# EAGLE board 3DPRINTER_HEATER2-4d (EAGLE 6.1)
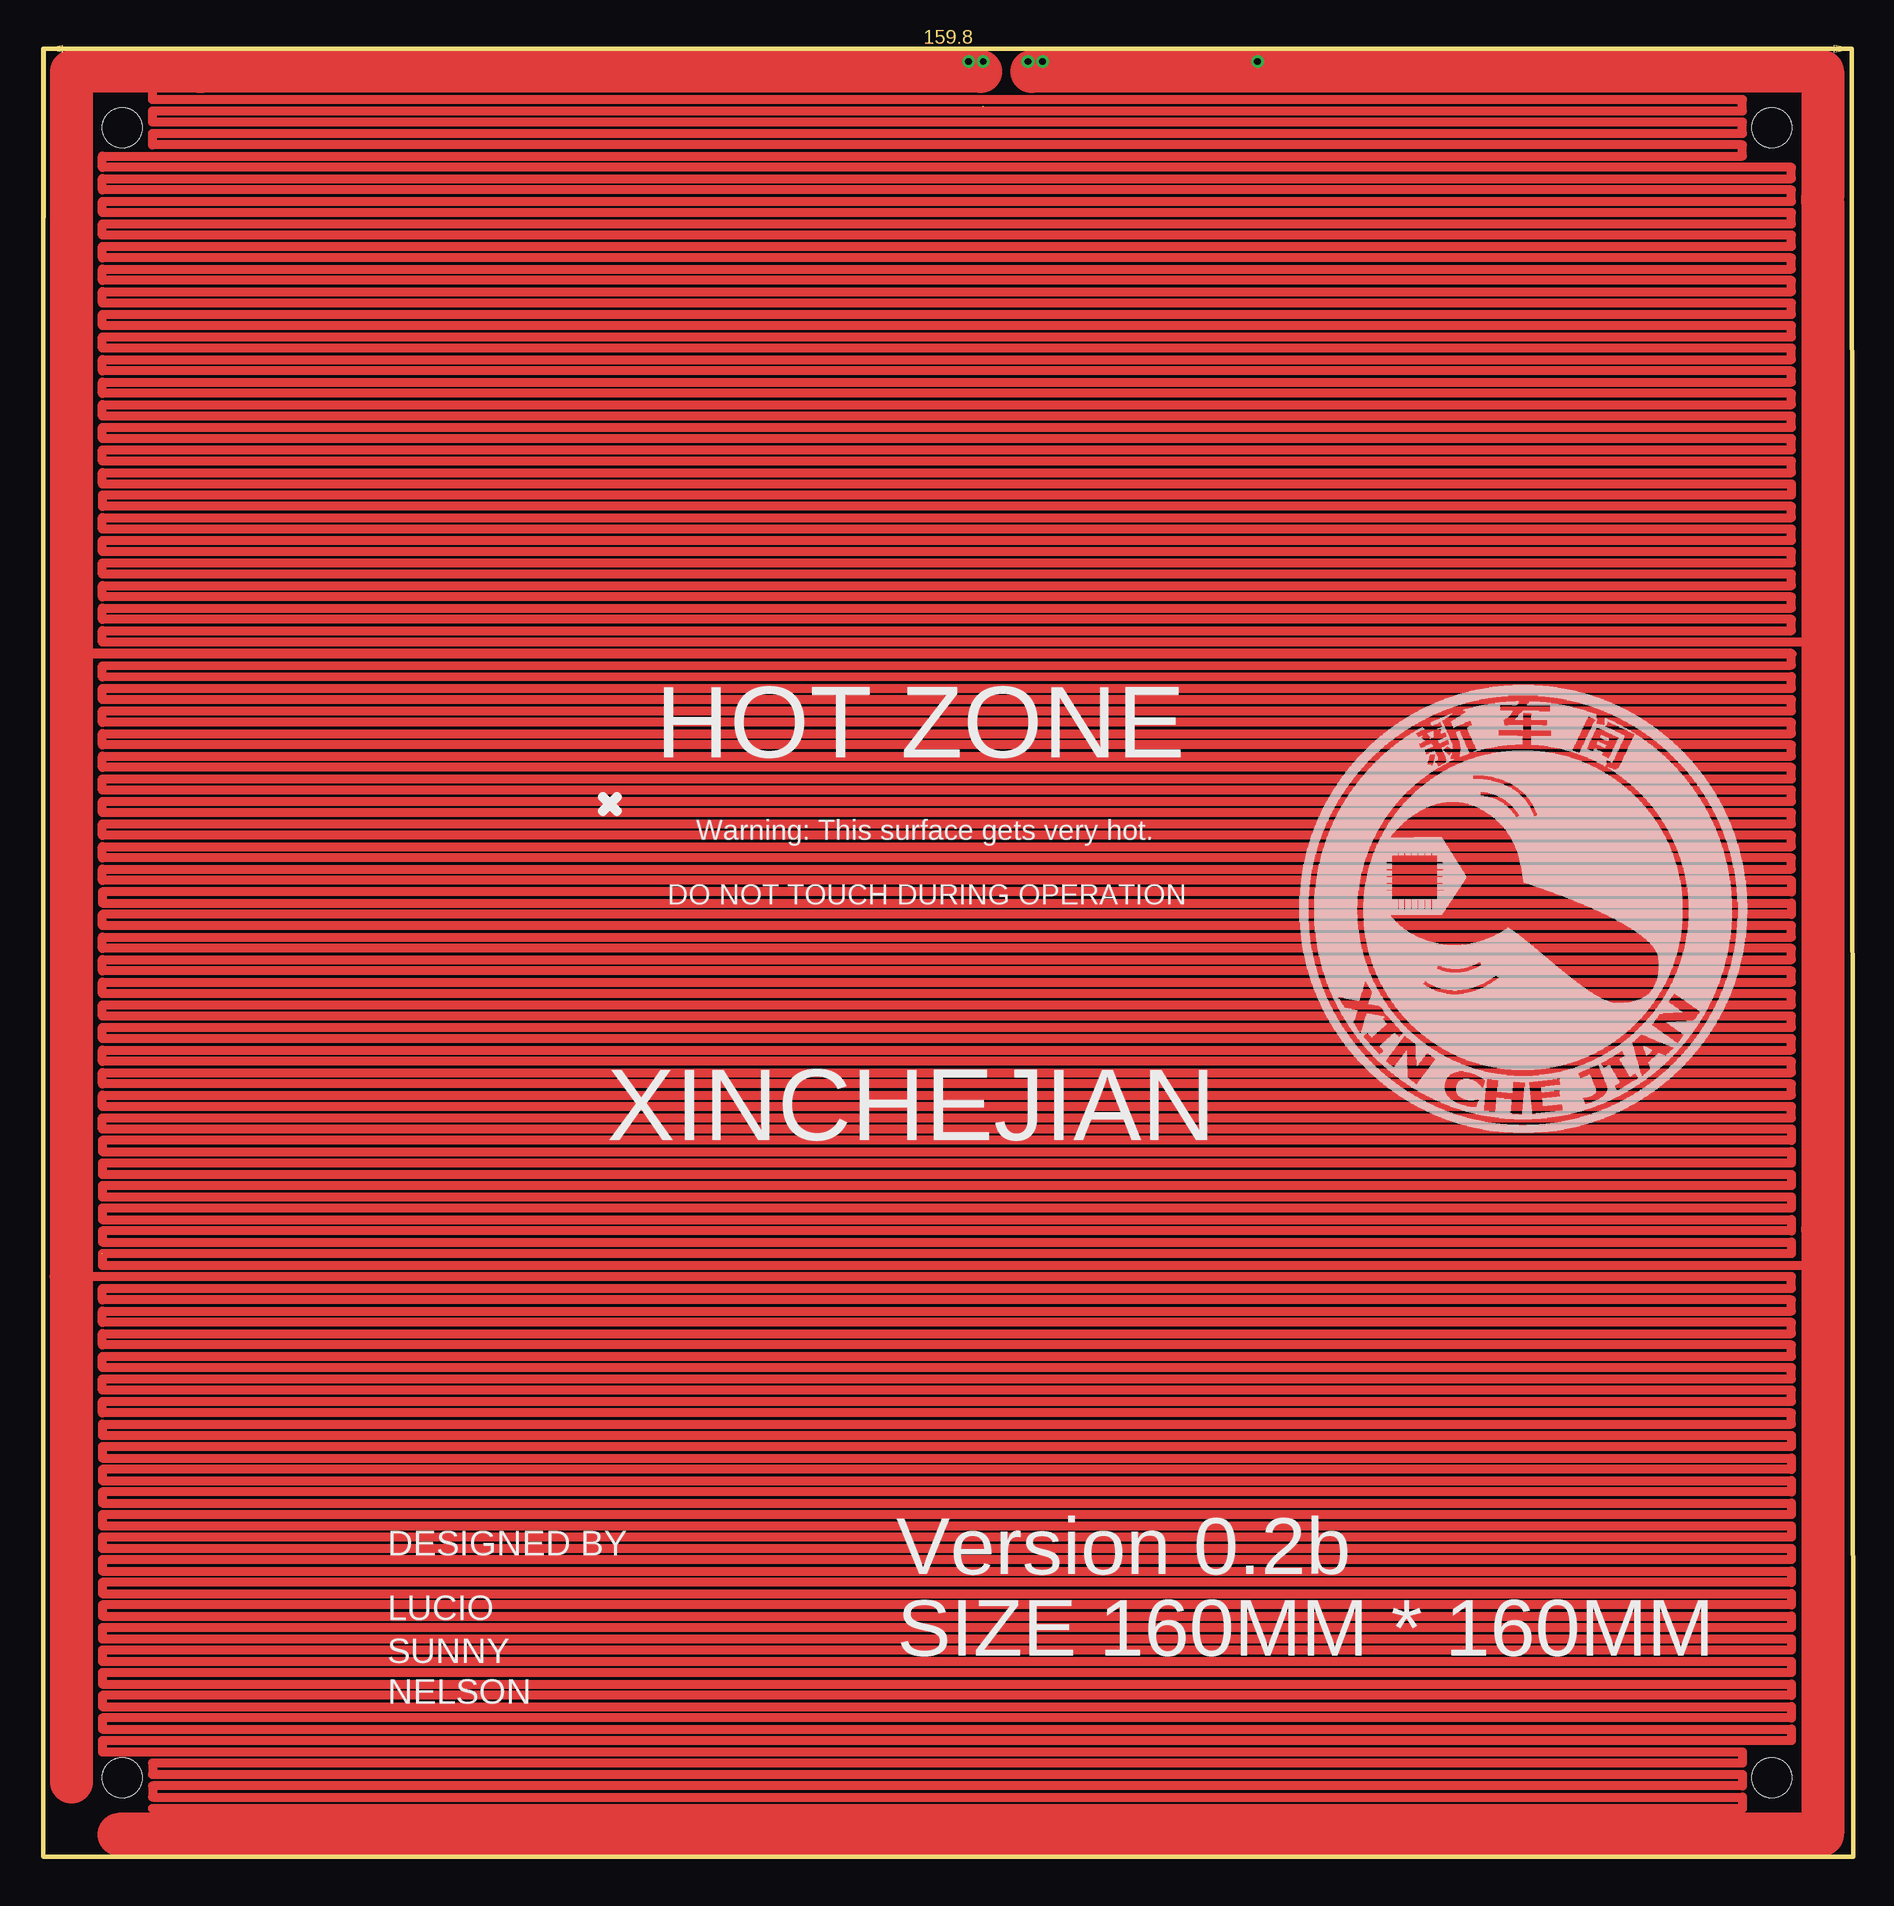
[diagram p0: board, top side]
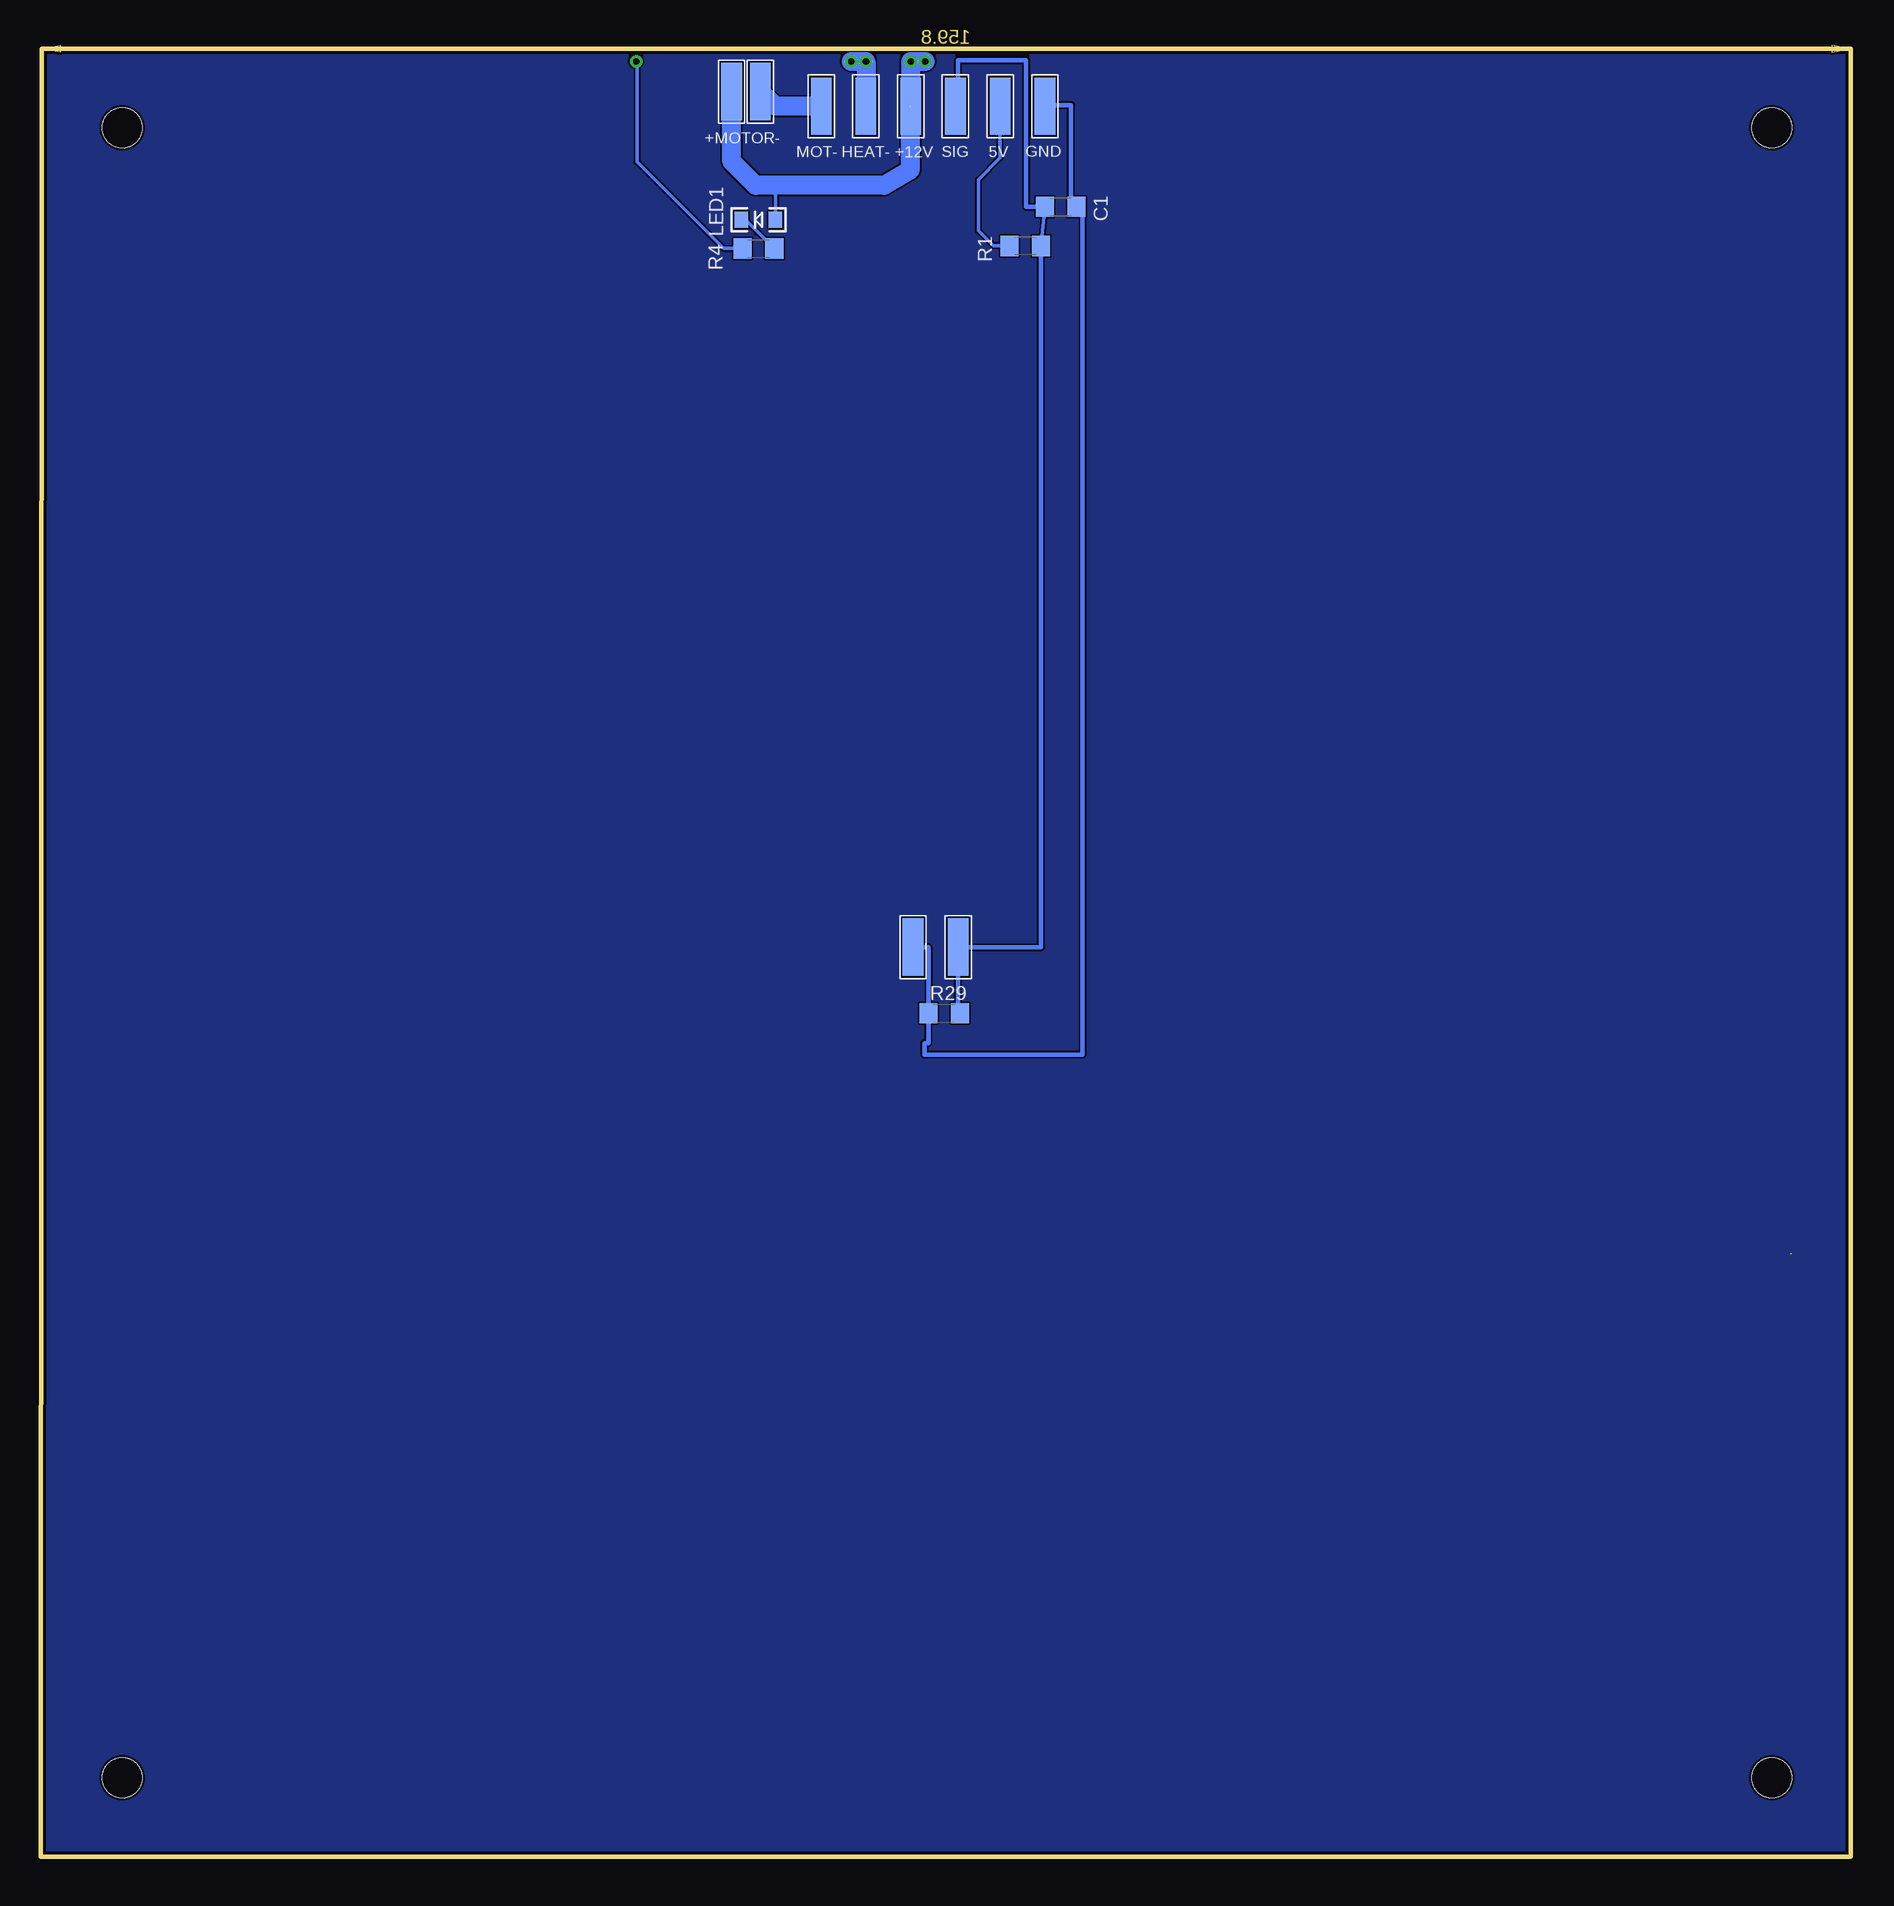
[diagram p1: board, bottom side, seen from below]

Size 160.2 x 160 mm. Coordinates in mm from the lower left corner, seen from the top.
Outline: 120.2,160 0.2,160 0,40
Outline: 160.1,160 160.2,0 0,0 0,160 160.1,160
Copper layers (1*16): Top 0.035mm / dielectric 1.5mm / Bottom 0.035mm
Design rules: minimum track width 10mil, minimum drill 20mil, track to track 6mil, track to pad 10mil, pad to pad 10mil, via to via 10mil, smd to smd 10mil, copper to edge 10mil, drill to drill 8mil, minimum pad ring 12mil, minimum via ring 10mil, stop-mask expansion 4mil, vias tented up to drill 25mil, thermal gap 10mil
Holes 3.5 mm at 153,153 7,153 7,7 153,7

## Footprints (pad centres in the part's own frame; a part is rotated, then mirrored left to right if it is on the bottom)
5-1,8 = smd 1.829 x 5.08: 1 0,0
C1206 = smd 1.6 x 1.8: 1 -1.4,0; 2 1.4,0
LED-1206 = smd 1.2 x 1.4: A -1.5,0; C 1.5,0
1206 = smd 1.6 x 1.8: 1 -1.4,0; 2 1.4,0

## Placement (x,y rotation side)
+12V  WIREPADSMD5-1,8  [5-1,8]  83.21,154.91 180 bottom
C1  [C1206]  69.93,146.01 0 bottom
GND-PAD1  WIREPADSMD5-1,8  [5-1,8]  83,80.5 0 bottom
GND-PAD7  WIREPADSMD5-1,8  [5-1,8]  71.32,154.91 180 bottom
HEATER-  WIREPADSMD5-1,8  [5-1,8]  87.17,154.91 180 bottom
LED1  [LED-1206]  96.68,144.87 180 bottom
MOTOR+  WIREPADSMD5-1,8  [5-1,8]  99.06,156.2 0 bottom
MOTOR-  WIREPADSMD5-1,8  [5-1,8]  96.52,156.2 0 bottom
MPOWER-  WIREPADSMD5-1,8  [5-1,8]  91.14,154.91 0 bottom
R1  [1206]  73.07,142.55 180 bottom
R4  [1206]  96.68,142.33 0 bottom
R29  [1206]  80.23,74.65 0 bottom
SIG-PAD1  WIREPADSMD5-1,8  [5-1,8]  79,80.5 0 bottom
SIG-PAD5  WIREPADSMD5-1,8  [5-1,8]  79.25,154.91 180 bottom
VCC-PAD6  WIREPADSMD5-1,8  [5-1,8]  75.29,154.91 180 bottom

## Library data of the parts
+12V GND-PAD1 GND-PAD7 HEATER- MOTOR+ MOTOR- MPOWER- SIG-PAD1 SIG-PAD5 VCC-PAD6 = wirepad
C1 = resistor
LED1 R1 R4 R29 = SparkFun

## Nets
N$1: R4.1
N$2: LED1.C R4.2
N$3: C1.2 GND-PAD1.1 GND-PAD7.1 R29.1
N$4: C1.1 R1.1 R29.2 SIG-PAD1.1 SIG-PAD5.1
N$6: MOTOR-.1 MPOWER-.1
N$8: R1.2 VCC-PAD6.1
N$37: +12V.1 LED1.A MOTOR+.1
S$3: HEATER-.1

## Tracks (layer width: path | path; a pad name or v marks a point on that pad's centre or on a via)
N$1  (via drill 0.6)
  Bottom 0.305: 107.48,158.86 v107.49,158.87 107.44,158.82 107.44,149.98 99.79,142.33 98.23,142.33
  Bottom 0.508: 98.04,142.33 R4.1 98.23,142.33
N$2
  Bottom 0.305: LED1.C 97.82,144.87 R4.2
N$3
  Bottom 0.305: GND-PAD7.1 71.12,155.11
  Bottom 0.406: GND-PAD7.1 71.32,155 69,155 69,146.01 C1.2 68,146.01 68,71 82,71 82,72 81.63,72 R29.1 81.63,80.5 GND-PAD1.1
N$4
  Bottom 0.305: SIG-PAD5.1 79.25,156.43 | 71.68,142.54 R1.1 C1.1
  Bottom 0.406: SIG-PAD5.1 79,154.91 79,159 73,159 73,146 71,146 71,146.01 C1.1 | R29.2 79,74.65 SIG-PAD1.1 71.67,80.5 R1.1
N$6
  Bottom 1.676: MPOWER-.1 95.22,154.91 MOTOR-.1
N$8
  Bottom 0.305: R1.2 74.48,142.56 75.89,142.56 77.22,143.89 77.22,148.41 75.29,150.34 VCC-PAD6.1
N$37  (1 unrouted)
  Bottom 0.305: 97.07,148.04 97.07,147.9 | LED1.A 95.18,147.83 95.25,147.9
  Bottom 1.676: 83.24,154.88 83.24,149.3 85.55,147.9 95.25,147.9 96.93,147.9 97.07,148.04 99.06,150.03 MOTOR+.1
S$1
  Top 0.813: 154.75,55.4 5.25,55.4
S$2  (via drill 0.6)
  Bottom 1.676: v81.92,158.87 v83.21,158.87 83.21,154.91
S$3  (via drill 0.6)
  Bottom 0.305: HEATER-.1 87.22,154.96
  Bottom 0.864: HEATER-.1 87.22,154.91
  Bottom 1.016: HEATER-.1 87.22,154.86
  Bottom 1.676: v88.47,158.87 v87.17,158.87 HEATER-.1
S$4
  Top 2.54: 145,158 145.5,158
S$5  (1 unrouted)
  Top 0.406: 5.25,57.4 5.25,56.3 154.75,56.3 | 5.25,55.4 5.25,55.5 154.75,55.5 | 154.75,58.4 154.75,58.2 | 154.75,54.35 154.75,54.4 | 154.75,53.4 154.75,53.55
  Top 0.813: 154.75,58.4 5.25,58.4 5.25,59.4 154.75,59.4 154.75,60.4 5.25,60.4 5.25,61.4 154.75,61.4 154.75,62.4 5.25,62.4 5.25,63.4 154.75,63.4 154.75,64.4 5.25,64.4 5.25,65.4 154.75,65.4 154.75,66.4 5.25,66.4 5.25,67.4 154.75,67.4 154.75,68.4 5.25,68.4 5.25,69.4 154.75,69.4 154.75,70.4 5.25,70.4 5.25,71.4 154.75,71.4 154.75,72.4 5.25,72.4 5.25,73.4 154.75,73.4 154.75,74.4 5.25,74.4 5.25,75.4 154.75,75.4 154.75,76.4 5.25,76.4 5.25,77.4 154.75,77.4 154.75,78.4 5.25,78.4 5.25,79.4 154.75,79.4 154.75,80.4 5.25,80.4 5.25,81.4 154.75,81.4 154.75,82.4 5.25,82.4 5.25,83.4 154.75,83.4 154.75,84.4 5.25,84.4 5.25,85.4 154.75,85.4 154.75,86.4 5.25,86.4 5.25,87.4 154.75,87.4 154.75,88.4 5.25,88.4 5.25,89.4 154.75,89.4 154.75,90.4 5.25,90.4 5.25,91.4 154.75,91.4 154.75,92.4 5.25,92.4 5.25,93.4 154.75,93.4 154.75,94.4 5.25,94.4 5.25,95.4 154.75,95.4 154.75,96.4 5.25,96.4 5.25,97.4 154.75,97.4 154.75,98.4 5.25,98.4 5.25,99.4 154.75,99.4 154.75,100.4 5.25,100.4 5.25,101.4 154.75,101.4 154.75,102.4 5.25,102.4 5.25,103.4 154.75,103.4 154.75,104.45 5.25,104.4 5.25,105.4 154.75,105.45 154.75,106.45 | 154.75,58.2 154.75,57.4 5.25,57.4 5.25,56.4 154.75,56.4 | 154.75,56.3 154.75,55.5 | 154.75,54.4 5.25,54.4 5.25,55.4 | 5.25,53.4 154.75,53.4 | 154.75,54.35 154.75,53.55 | 158,52.35 5.25,52.35 5.25,53.35
  Top 0.863: 154.75,106.45 1.1,106.45
S$6
  Top 3.81: 157.5,2 6.7,2
S$8
  Top 0.813: 0.95,51.35 154.75,51.35 154.75,50.3 5.25,50.3 5.25,49.3 154.75,49.3 154.75,48.3 5.25,48.3 5.25,47.3 154.75,47.3 154.75,46.3 5.25,46.3 5.25,45.3 154.75,45.3 154.75,44.3 5.25,44.3 5.25,43.3 154.75,43.3 154.75,42.3 5.25,42.3 5.25,41.3 154.75,41.3 154.75,40.3 5.25,40.3 5.25,39.3 154.75,39.3 154.75,38.3 5.25,38.3 5.25,37.3 154.75,37.3 154.75,36.3 5.25,36.3 5.25,35.3 154.75,35.3 154.75,34.3 5.25,34.3 5.25,33.3 154.75,33.3 154.75,32.3 5.25,32.3 5.25,31.3 154.75,31.3 154.75,30.3 5.25,30.3 5.25,29.3 154.75,29.3 154.75,28.3 5.25,28.3 5.25,27.3 154.75,27.3 154.75,26.3 5.25,26.3 5.25,25.3 154.75,25.3 154.75,24.3 5.25,24.3 5.25,23.3 154.75,23.3 154.75,22.3 5.25,22.3 5.25,21.3 154.75,21.3 154.75,20.3 5.25,20.3 5.25,19.3 154.75,19.3 154.75,18.3 5.25,18.3 5.25,17.3 154.75,17.3 154.75,16.3 5.25,16.3 5.25,15.3 154.75,15.3 154.75,14.3 5.25,14.3 5.25,13.3 154.75,13.3 154.75,12.3 5.25,12.3 5.25,11.3 154.75,11.3 154.75,10.3 5.25,10.3 5.25,9.3
S$14
  Top 2.54: 145.41,158.11 87.63,158.11
S$15
  Top 0.813: 5.25,9.3 150.4,9.3 150.4,8.3 9.7,8.3 9.7,7.3 150.4,7.3 150.4,6.3 9.7,6.3 9.7,5.3 150.4,5.3 150.4,4.3 9.7,4.3
S$16
  Top 0.813: 9.7,158 9.7,155.5 150.4,155.5 150.4,154.5 9.7,154.5 9.7,153.5 150.4,153.5 150.4,152.5 9.7,152.5 9.7,151.5 150.4,151.5 150.4,150.5 5.25,150.5 5.25,149.5 154.75,149.5 154.75,148.5 5.25,148.5 5.25,147.5 154.75,147.5 154.75,146.5 5.25,146.5 5.25,145.5 154.75,145.5 154.75,144.5 5.25,144.5 5.25,143.5 154.75,143.5 154.75,142.5 5.25,142.5 5.25,141.5 154.75,141.5 154.75,140.5 5.25,140.5 5.25,139.5 154.75,139.5 154.75,138.5 5.25,138.5 5.25,137.5 154.75,137.5 154.75,136.5 5.25,136.5 5.25,135.5 154.75,135.5 154.75,134.5 5.25,134.5 5.25,133.5 154.75,133.5 154.75,132.5 5.25,132.5 5.25,131.5 154.75,131.5 154.75,130.5 5.25,130.5 5.25,129.5 154.75,129.5 154.75,128.5 5.25,128.5 5.25,127.5 154.75,127.5 154.75,126.5 5.25,126.5 5.25,125.5 154.75,125.5 154.75,124.5 5.25,124.5 5.25,123.5 154.75,123.5 154.75,122.5 5.25,122.5 5.25,121.5 154.75,121.5 154.75,120.5 5.25,120.5 5.25,119.5 154.75,119.5 154.75,118.5 5.25,118.5 5.25,117.5 154.75,117.5 154.75,116.5 5.25,116.5 5.25,115.5 154.75,115.5 154.75,114.5 5.25,114.5 5.25,113.5 154.75,113.5 154.75,112.5 5.25,112.5 5.25,111.5 154.75,111.5 154.75,110.5 5.25,110.5 5.25,109.5 154.75,109.5 154.75,108.5 5.25,108.5 5.25,107.5 157.5,107.5 | 157.5,55.75 157.5,55.5 157.25,55.5
  Top 3.81: 13.9,158 9.7,158 2.5,158 2.5,6.65 | 157.5,146.5 157.5,107.5 157.5,55.5 157.5,2.1
S$17
  Top 2.54: 83,158.5 82.5,158.5 82,158.5
S$18
  Top 2.54: 87.5,158.5 88,158.5
S$19
  Top 3.81: 87.5,158 157.5,158 157.5,146.8
S$20
  pour Bottom: 0,159.9 160.1,159.9 160.1,0.1 0,0.1
S$21
  pour Bottom: 0,159.9 0.25,159.9 0.25,159.7
S$25
  Top 2.54: 82.5,158 82,157.5 13.5,157.5
S$26
  Top 3.81: 83,158 14,158

## Text on the board
tPlace: HOT ZONE | Warning: This surface gets very hot. | DO NOT TOUCH DURING OPERATION
bPlace: +MOTOR- | GND | 5V | SIG | +12V | HEAT- | MOT-
tNames: XINCHEJIAN | DESIGNED BY | Version 0.2b | LUCIO | SIZE 160MM * 160MM | SUNNY | NELSON